# Altium PCB PCB2.PcbDoc
Units mil, origin at the board's own origin, x right, y up, seen from the top; angles counter-clockwise.
Board outline 10.03 x 2033.01 mil, 2 copper layers (Top Layer, Bottom Layer); 35 components, 24 nets, 143 pads, 11 vias.
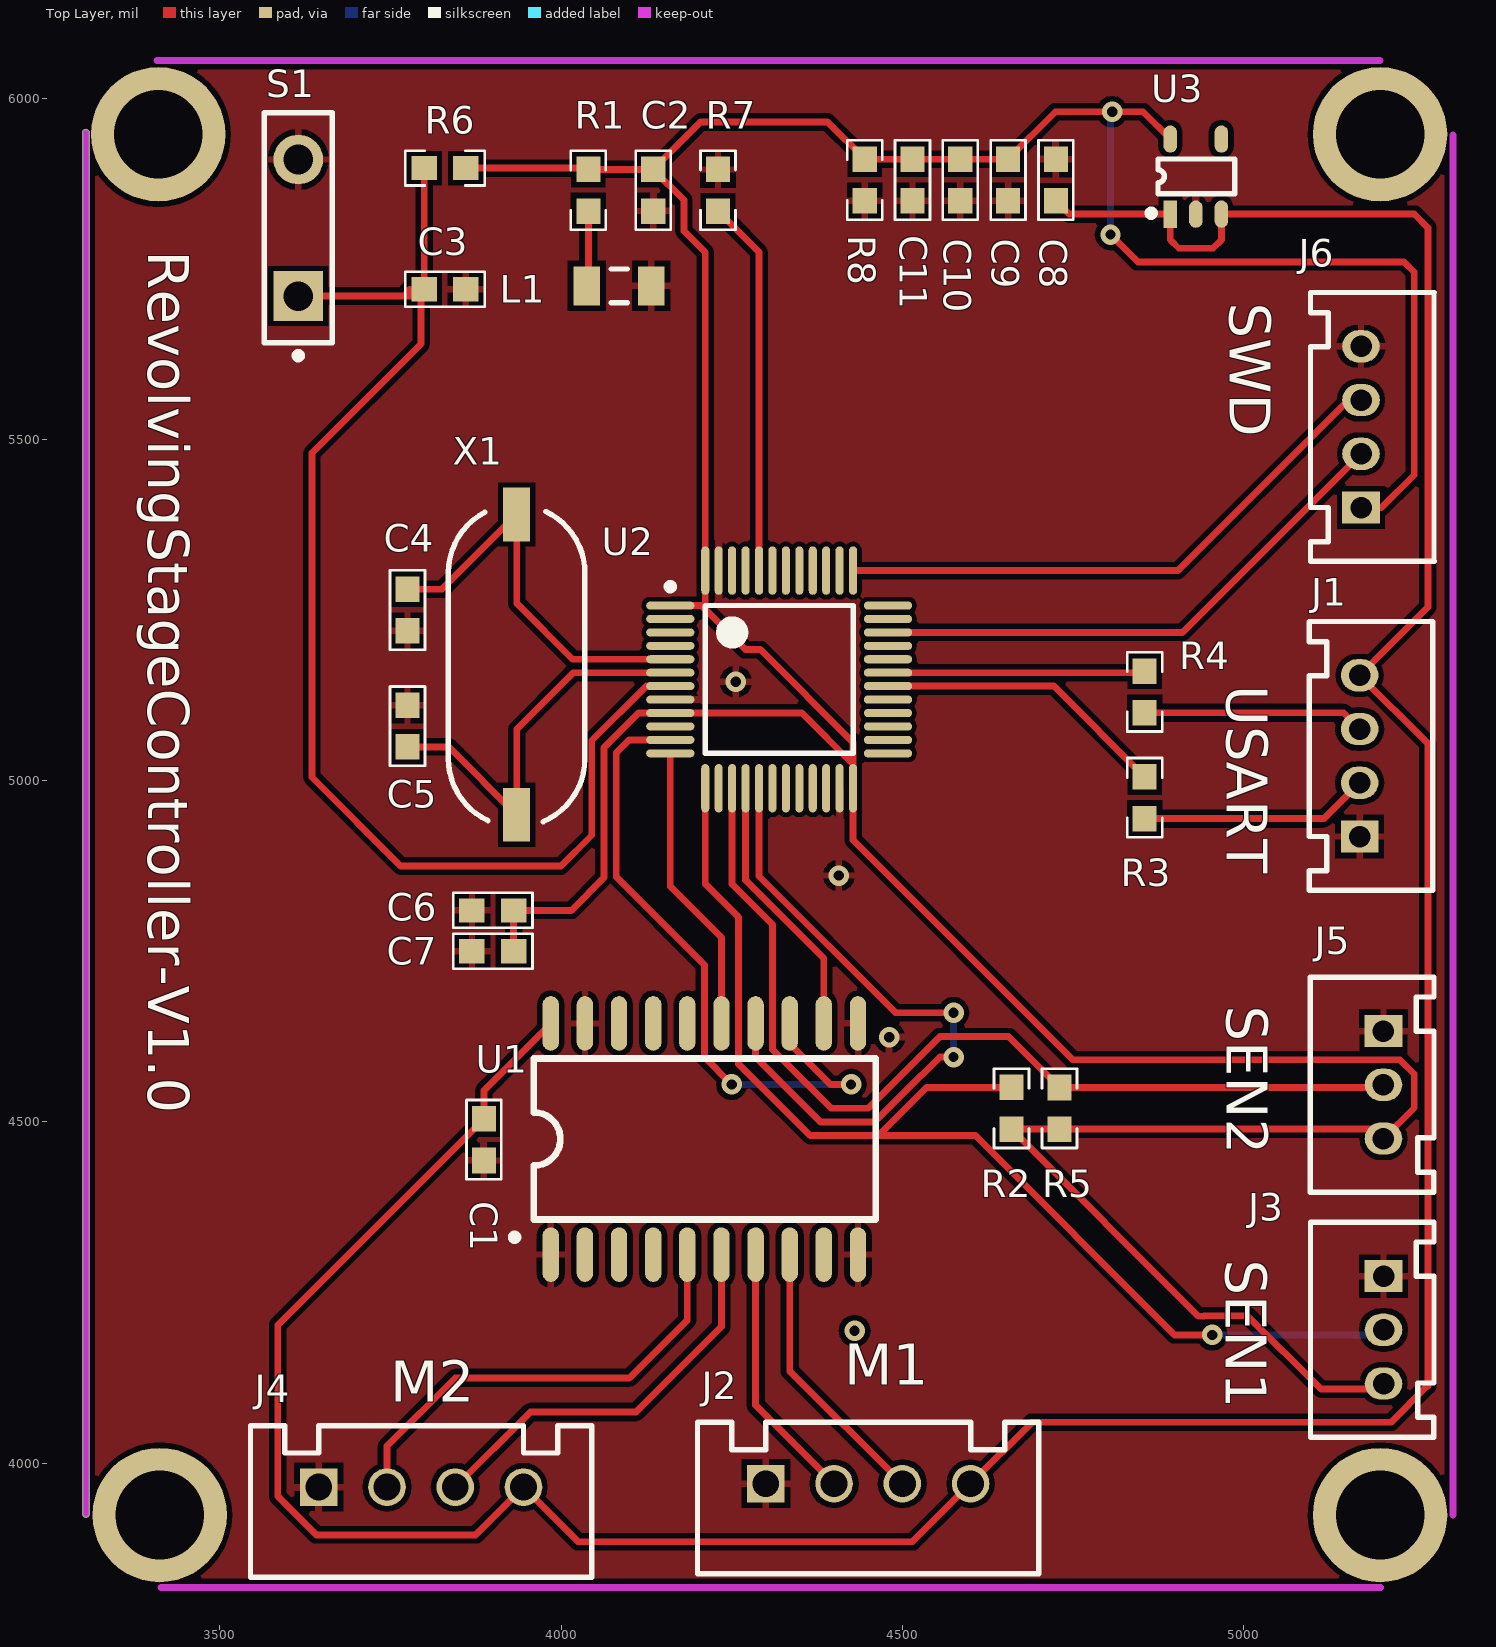
[diagram p0: Top Layer view]
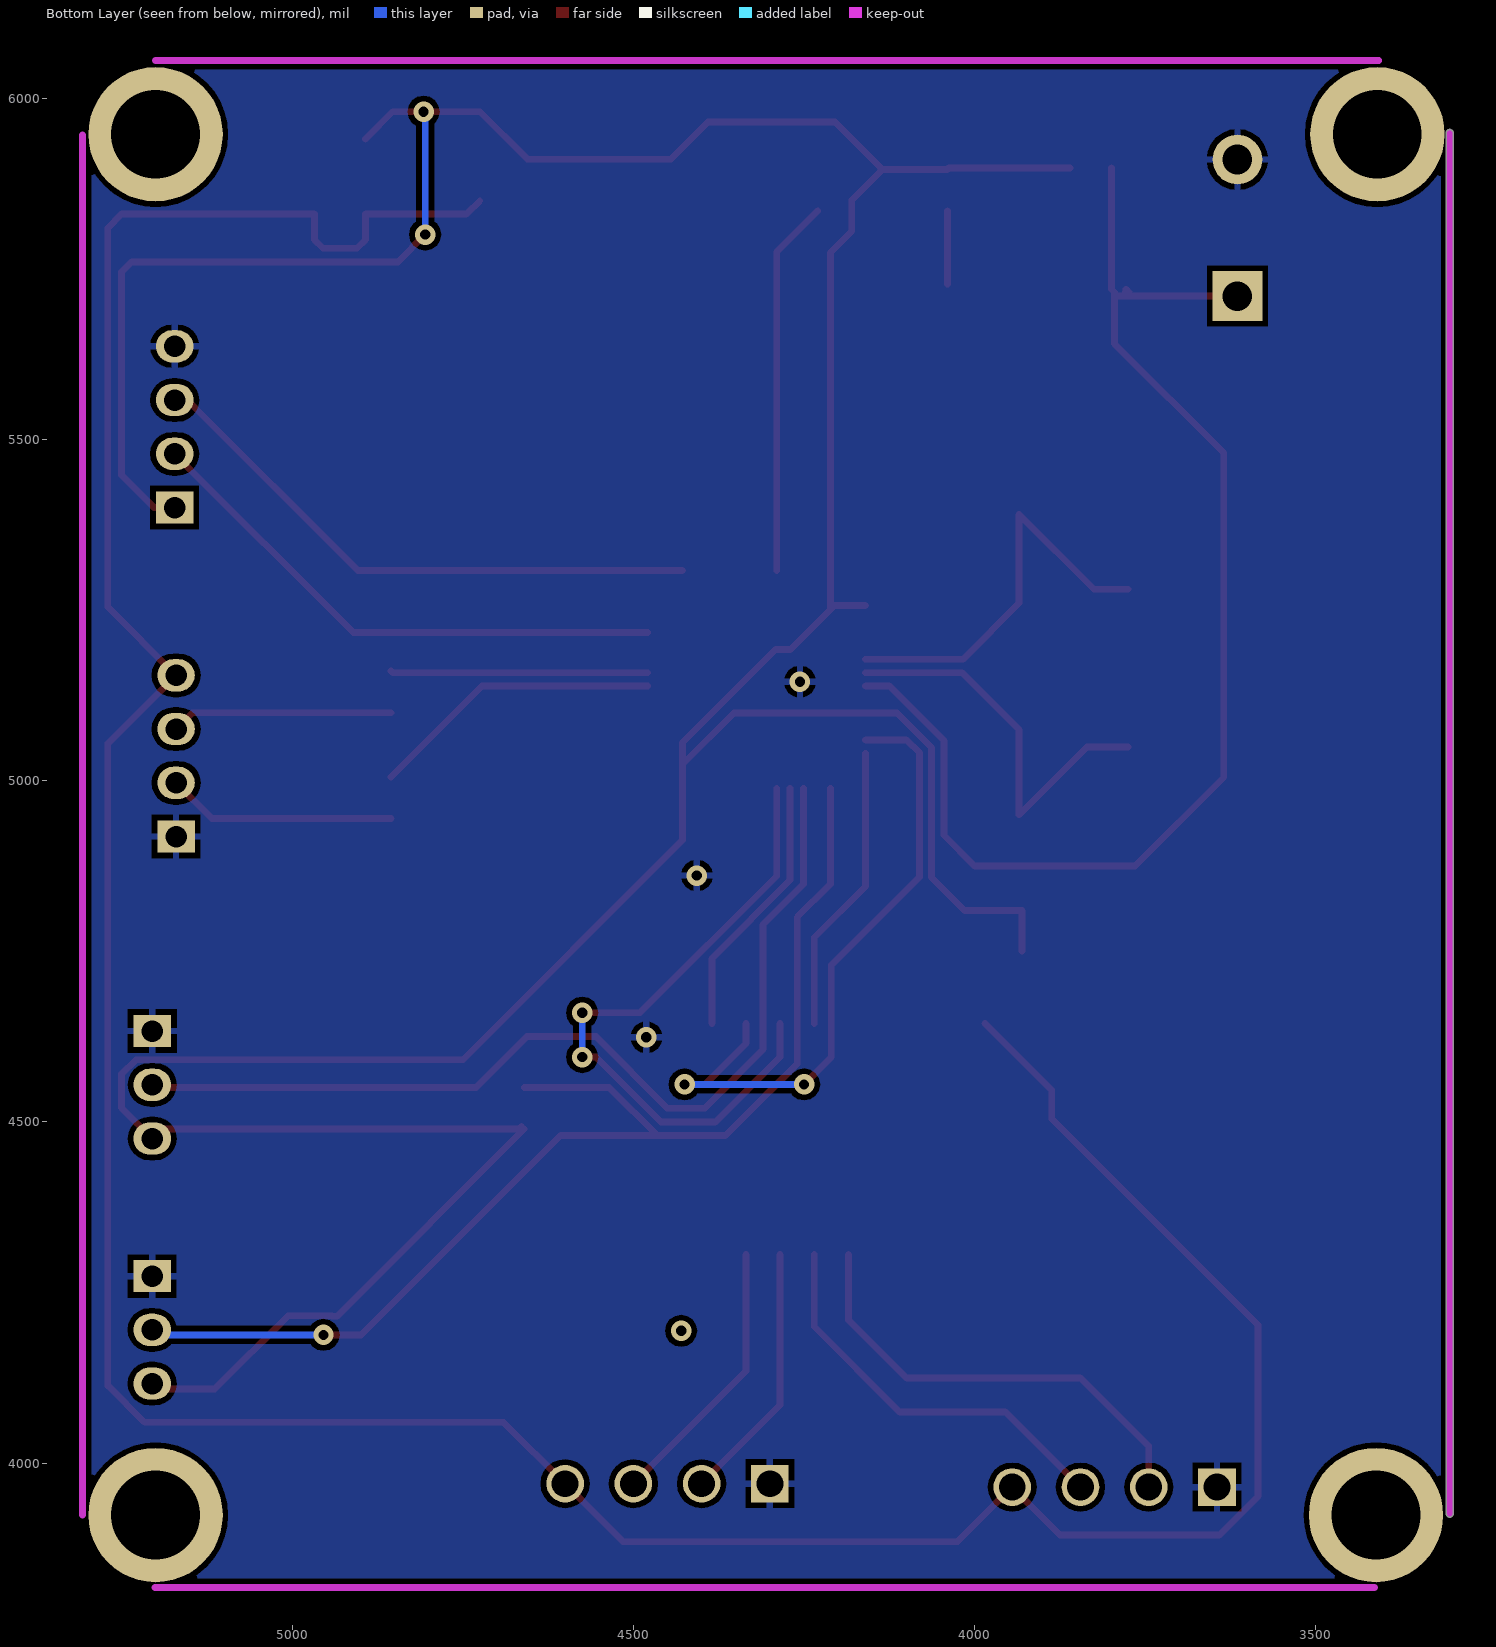
[diagram p1: Bottom Layer view, seen from below]

## Layer stack, top to bottom
Top Layer: signal copper 1.4
Dielectric: dielectric 12.6, FR-4, Dk 4.8
Bottom Layer: signal copper 1.4

## Board outline
3298.99,3926 ccw(c3304,3926) 3309.01,3926 3309.01,5949 ccw(c3304,5949) 3309.01,5949.05 ccw(c3304,5949) 3298.99,5949

## Design rules (kind name [scope] priority, off if disabled: settings)
Clearance mcu [InComponent('U2')] p1: gap=7
Clearance Clearance_1 [All] p2: gap=8
ComponentClearance [All] p1: gap=0 collisioncheckmode=3 verticalgap=0 showdistances=FALSE
HoleSize [All] p1: absolutevalues=TRUE maxlimit=200 minlimit=1 maxpercent=80.000 minpercent=20.000
MinimumSolderMaskSliver [All] p1: minsoldermaskwidth=5
PolygonConnect [All] p1: connectstyle=Relief reliefconductorwidth=10 reliefentries=4 polygonreliefangle="90 Angle"
RoutingVias [All] p1: holewidth=15 width=30 viastyle="Through Hole" minholewidth=2 minwidth=5 maxholewidth=15 maxwidth=30
SilkscreenOverComponentPads [All] p1: minsilkscreentomaskgap=5
SolderMaskExpansion [All] p1: expansion=4
Width [All] p1: maxlimit=20 minlimit=10 preferedwidth=10
24 further rules are at their usual default settings.

## Classes and differential pairs
component class 转台控制板原理图: C1 C2 C3 C4 C5 C6 C7 C8 C9 C10 C11 J1 J2 J3 J4 J5 J6 L1 R1 R2 R3 R4 R5 R6 R7 R8 S1 U1 U2 U3 X1

## Components (designator, comment, footprint, x,y, rotation, side; value= is the part's Value field where it differs from the comment)
C1 "C0603" C0603_M1608 3887,4474 r270 top
C2 "C0603" C0603_M1608 4135,5865 r270 top
C3 "C0603" C0603_M1608 3830,5720 r0 top
C4 "C0603" C0603_M1608 3775,5250 r90 top
C5 "C0603" C0603_M1608 3775,5080 r270 top
C6 "C0603" C0603_M1608 3900,4810 r180 top
C7 "C0603" C0603_M1608 3900,4750 r180 top
C8 "C0603" C0603_M1608 4725,5880 r270 top
C9 "C0603" C0603_M1608 4655,5880 r270 top
C10 "C0603" C0603_M1608 4585,5880 r90 top
C11 "C0603" C0603_M1608 4515,5880 r90 top
J1 "PH2.0-4P" PH2.0-4P 5170,5115 r90 top
J2 "XH2.54-4P" XH2.54-4 4350,3970 r0 top
J3 "PH2.0-3P" PH2.0-3P 5205,4156 r270 top
J4 "XH2.54-4P" XH2.54-4 3695,3965 r0 top
J5 "PH2.0-3P" PH2.0-3P 5204.9,4515 r270 top
J6 "PH2.0-4P" PH2.0-4P 5172,5597 r90 top
L1 "LED" C2012 4085,5725 r0 top
R1 "R0603" 0603 4040,5865 r90 top
R2 "R0603" 0603 4660,4520 r90 top
R3 "R0603" 0603 4855,4975 r90 top
R4 "R0603" 0603 4855,5130 r90 top
R5 "R0603" 0603 4730.31,4519.96 r90 top
R6 "R0603" 0603 3830,5897.48 r180 top
R7 "R0603" 0603 4230,5865 r270 top
R8 "R0603" 0603 4445,5880 r90 top
S1 "SW-PB" SPST-2 3615,5810 r90 top
U1 "SOP-20" SOP-20 4210,4475 r90 top
U2 "LQFP48_N" LQFP48_N 4319.57,5148.31 r0 top
U3 "XC6503D331" SOT23-5 4930,5885 r90 top
X1 "8M" HC-49SMD 3935,5170 r90 top
? "" SH3.3 3412,3925 r0 top
? "" SH3.3 5200,3925 r0 top
? "" SH3.3 5200,5948 r0 top
? "" SH3.3 3410,5948 r0 top

## Footprints (in the part's own frame and the unit in brackets; to place one, negate y for a bottom-side part, rotate by r counter-clockwise, add the part's x,y. Pads: shape width x height; smd on the part's side, far side on the other; paste and mask are expansions set on the pad)
0603 [mm]
  rect 0.95x0.9 smd: 1(-0.775,0) 2(0.775,0)
  silkscreen extent -1.48,-0.65 1.47,0.65
C0603_M1608 [mm] "Chip Cap"
  rect 0.95x0.9 smd: 1(-0.775,0) 2(0.775,0)
  silkscreen extent -1.48,-0.65 1.48,0.65
C2012 [mm] "Chip"
  rect 1x1.45 smd: 1(-1.2,0) 2(1.2,0)
  silkscreen extent -0.3,-0.63 0.3,0.63, body extent -0.98,-0.6 1.02,0.6, height 0.5
HC-49SMD [mm]
  rect 2x1 smd: 1(-5.588,0) 2(5.588,0)
  silkscreen extent -5.84,-2.54 5.7,2.54
LQFP48_N [mm]
  oval 1.8x0.3 smd: 1(-4.05,2.75) 2(-4.05,2.25) 3(-4.05,1.75) 4(-4.05,1.25) 5(-4.05,0.75) 6(-4.05,0.25) 7(-4.05,-0.25) 8(-4.05,-0.75) 9(-4.05,-1.25) 10(-4.05,-1.75) 11(-4.05,-2.25) 12(-4.05,-2.75) 25(4.05,-2.75) 26(4.05,-2.25) 27(4.05,-1.75) 28(4.05,-1.25) 29(4.05,-0.75) 30(4.05,-0.25) 31(4.05,0.25) 32(4.05,0.75) 33(4.05,1.25) 34(4.05,1.75) 35(4.05,2.25) 36(4.05,2.75)
  oval 0.3x1.8 smd: 13(-2.75,-4.05) 14(-2.25,-4.05) 15(-1.75,-4.05) 16(-1.25,-4.05) 17(-0.75,-4.05) 18(-0.25,-4.05) 19(0.25,-4.05) 20(0.75,-4.05) 21(1.25,-4.05) 22(1.75,-4.05) 23(2.25,-4.05) 24(2.75,-4.05) 37(2.75,4.05) 38(2.25,4.05) 39(1.75,4.05) 40(1.25,4.05) 41(0.75,4.05) 42(0.25,4.05) 43(-0.25,4.05) 44(-0.75,4.05) 45(-1.25,4.05) 46(-1.75,4.05) 47(-2.25,4.05) 48(-2.75,4.05)
  silkscreen extent -4.17,-2.75 2.75,3.57
PH2.0-3P [mm]
  rect 1.2x1.4 hole 0.8: 1(-3,0)
  oval 1.2x1.4 hole 0.8: 2(-1,0) 3(1,0)
  silkscreen extent -5,-2.72 3,1.88
PH2.0-4P [mm]
  rect 1.2x1.4 hole 0.8: 1(-5,0)
  oval 1.2x1.4 hole 0.8: 2(-3,0) 3(-1,0) 4(1,0)
  silkscreen extent -7.01,-2.72 3,1.88
SH3.3 [mm]
  round 5 hole 3.3: 1(0,-0.025)
SOP-20 [mil]
  oval 80x24 smd: 1(-169.29,225) 2(-169.29,175) 3(-169.29,125) 4(-169.29,75) 5(-169.29,25) 6(-169.29,-25) 7(-169.29,-75) 8(-169.29,-125) 9(-169.29,-175) 10(-169.29,-225) 11(169.29,-225) 12(169.29,-175) 13(169.29,-125) 14(169.29,-75) 15(169.29,-25) 16(169.29,25) 17(169.29,75) 18(169.29,125) 19(169.29,175) 20(169.29,225)
  silkscreen extent -149,-251 118,283
SOT23-5 [mil] "SOT23, 5-Leads, Body 3.1x3."
  rect 40x20 smd: 1(-55,37.4)
  oval 40x20 smd: 2(-55,0) 3(-55,-37.4) 4(55,-37.4) 5(55,37.4)
  silkscreen extent -59,-57 26,70
SPST-2 [mm]
  rect 1.85x1.85 hole 1.1: 1(-2.54,0)
  round 1.85 hole 1.1: 2(2.54,0)
  silkscreen extent -4.89,-1.27 4.28,1.27
XH2.54-4 [mm]
  rect 1.4x1.4 hole 1: 1(-1.27,0)
  round 1.4 hole 1: 2(1.27,0) 3(3.81,0) 4(6.35,0)
  silkscreen extent -3.81,-3.35 8.89,2.29

## Part data
C1 C2 C3 C4 C5 C6 C7 C8 C9 C10 C11: library part Cap, "Capacitor"
J1 J2 J4 J6: library part "Header 4", "Header"
J3 J5: library part "Header 3", "Header"
R1 R2 R3 R4 R5 R6 R7 R8: library part Res1, "R"
U2: library part STM32F103C8T6, "STM32 ARM-based 32-bit MCU with 64 Kbytes Flash, 48-pin LQFP, Industrial Temp"
U3: library part XC6503Dxxx

## Via types
v1: diameter 30, hole 15, Top Layer to Bottom Layer, 11 vias

## Nets (pads, with @x,y where several pads share a name; then routed paths per layer and width w, separated by ;. In a path a pad name is that pad's centre, name@x,y a point inside that pad or via, vN(x,y) a via of type N, cw(c..) or ccw(c..) an arc to the next point about the centre after c; other vN are vias at no path point)
3.3V: C2.1 C6.1 C7.1 C9.1 C10.2 C11.2 J3.3 J5.3 J6.1 R1.2 R2.1 R5.1 R6.1 R8.2 U2.1 U2.9 U2.24 U2.48 U3.5 | length 6491.1
  Top Layer w10: R6.1 4038.03,5897.48 R1.2 C2.1 ; C7.1 C6.1 4015,4810 4063,4858 4063,5048.46 4113.64,5099.09 U2.9 4352.76,5099.09 U2.24@4427.83,5024.02 ; U2.1 4205.43,5256.57 4211.3,5250.7 ; R2.1 4934.19,4215.3 4941.7,4215.3 4942.4,4216 5006,4216 5113.37,4108.63 J3.3@5203.9,4108.63 ; R2.1@4663.76,4493.24 4667.51,4489.49 4730.27,4489.49 R5.1 5191.08,4489.45 J5.3 5250,4520.73 5250,4570 5229.01,4590.99 4750,4590.99 4427.83,4913.16 U2.24 U2.24@4427.83,5024.02 ; v1(4805,5800) 4845,5760 5235,5760 5250,5745 5250,5448 5202.15,5400.15 J6.1 ; U3.5 4852.6,5980 v1(4807.4,5980) 4724.49,5980 C9.1 C10.2 C11.2 R8.2 4390.51,5965 4204.49,5965 C2.1 ; C2.1 4180,5850.51 4180,5805 4211.3,5773.7 U2.48 4211.3,5250.7 ; 4211.3,5250.7 4270.05,5191.95 4291.95,5191.95 4427.83,5056.06 U2.24@4427.83,5024.02
  Bottom Layer w10: v1(4805,5800) 4805,5977.6 v1(4807.4,5980)
5V: C1.1 C8.2 J1.4 J2.4 J4.4 U1.20 U3.1 U3.3 | length 5149.8
  Top Layer w10: U1.20 3887,4546.29 C1.1 3585,4202.51 3585,3951.5 3641.5,3895 3875,3895 J4.4 4025,3885 4515,3885 J2.4 ; J2.4@4599.49,3970.51 J2.4 ; C8.2 4744.49,5830 U3.1 4892.6,5792.4 4905,5780 4955,5780 4967.4,5792.4 U3.3 5250,5830 5270,5810 5270,5254.37 J1.4 5270,5054.37 5270,4113 ; 5269,4113 5216,4060 4690,4060 J2.4
GND: C1.2 C2.2 C3.2 C4.1 C5.1 C6.2 C7.2 C8.1 C9.2 C10.1 C11.1 J1.1 J2.1 J3.1 J4.1 J5.1 J6.4 L1.2 R7.1 R8.1 S1.2 U1.1 U1.10 U1.11 U1.19 U2.8 U2.23 U2.47 U3.2
  other v1: 4481,4624 4407,4861 4256,5145
NetC4_2: C4.2 U2.5 X1.2 | length 594.5
  Top Layer w10: C4.2 3825.51,5280.51 X1.2 3935,5260 4017.17,5177.83 U2.5
NetC5_2: C5.2 U2.6 X1.1 | length 585.7
  Top Layer w10: C5.2 3835.51,5049.49 X1.1 3935,5074.83 4018.32,5158.15 U2.6
NetJ1_2: J1.2 R3.1 | length 336.7
  Top Layer w10: R3.1 5117.6,4944.49 J1.2
NetJ1_3: J1.3 R4.1 | length 324.9
  Top Layer w10: R4.1 5146.14,5099.49 J1.3
NetJ2_2: J2.2 U1.7 | length 383.3
  Top Layer w10: U1.7 4285,4085 J2.2
NetJ2_3: J2.3 U1.8 | length 404.1
  Top Layer w10: U1.8 4335,4135 J2.3
NetJ4_2: J4.2 U1.5 | length 672.3
  Top Layer w10: J4.2 3745,4025 3845,4125 4100,4125 4185,4210 U1.5
NetJ4_3: J4.3 U1.6 | length 593
  Top Layer w10: J4.3 3955,4075 4110,4075 4235,4200 U1.6
NetL1_1: L1.1 R1.1 | length 107.2
  Top Layer w10: L1.1@4040,5727.24 R1.1
NetR7_2: R7.2 U2.44 | length 551.6
  Top Layer w10: R7.2 4290.04,5774.45 U2.44
RST: C3.1 R6.2 S1.1 U2.7 | length 1912.1
  Top Layer w10: S1.1 3773.96,5710 ; 3773.96,5715.51 3778.45,5720 ; 3779.47,5715.51 3773.96,5710 ; C3.1@3789.49,5710 3773.96,5710 ; C3.1@3795,5715.51 3795,5640 3635,5480 3635,5005 3765,4875 4000,4875 4045,4920 4045,5058.51 4124.95,5138.46 U2.7 ; C3.1 R6.2
SWCLK: J6.3 U2.37 | length 847.7
  Top Layer w10: U2.37 4903.76,5307.76 5153.63,5557.63 J6.3
SWDIO: J6.2 U2.34 | length 801.4
  Top Layer w10: U2.34 4910.31,5217.2 J6.2
UART1RX: R4.2 U2.31 | length 377
  Top Layer w10: U2.31 4852.64,5158.15 R4.2
UART1TX: R3.2 U2.30 | length 431.1
  Top Layer w10: U2.30 4722.05,5138.46 R3.2
信号1: J3.2 R2.2 U2.13 | length 1756.8
  Top Layer w10: U2.13 4211.3,4848.7 4260,4800 4260,4585 4365,4480 4465,4480 ; R2.2 4535.51,4550.51 4465,4480 ; v1(4954,4188) 4899,4188 4607,4480 4465,4480
  Bottom Layer w10: v1(4954,4188) 5203.27,4188 J3.2@5203.9,4187.37
信号2: J5.2 R5.2 U2.15 | length 1414
  Top Layer w10: U2.15 4250.67,4848.42 4310,4789.09 4310,4605.94 4395.94,4520 4450,4520 4555,4625 4655.78,4625 R5.2 5201,4550.47 J5.2
电机1PWM: U1.12 U2.16 | length 392.1
  Top Layer w10: U2.16 4270.35,4854.19 4385,4739.54 U1.12
电机1方向: U1.13 U2.11 | length 967
  Top Layer w10: U2.11 4099.72,5059.72 4081,5041 4081,4859 4210,4730 4210,4595 v1(4250,4555) ; U1.13 4335,4615 4395,4555 v1(4425,4555) v1@4430,4555
  Bottom Layer w10: v1(4250,4555) v1(4425,4555)
电机2PWM: U1.14 U2.17 | length 979.7
  Top Layer w10: U1.14 4285,4595 4380,4500 4459.54,4500 4528.06,4568.51 4528.51,4568.51 4555,4595 v1(4575,4595) ; U2.17 4290.04,4859.96 4490,4660 v1(4575,4660)
  Bottom Layer w10: v1(4575,4595) v1(4575,4660)
电机2方向: U1.15 U2.12 | length 426.8
  Top Layer w10: U2.12 4160.12,4844.88 4235,4770 U1.15
pads on no net: ?.1 U1.2 U1.3 U1.4 U1.9 U1.16 U1.17 U1.18 U2.2 U2.3 U2.4 U2.10 U2.14 U2.18 U2.19 U2.20 U2.21 U2.22 U2.25 U2.26 U2.27 U2.28 U2.29 U2.32 U2.33 U2.35 U2.36 U2.38 U2.39 U2.40 U2.41 U2.42 U2.43 U2.45 U2.46 U3.4
copper on no net:
  other v1: 4430,4194

## Polygon pours and split planes (outlines as drawn)
GND on Top Layer "Bottom Layer-No Net" (solid, remove dead copper, pour order 6): 3189,6128 3184,6123 3184,3780 5400,3780 5410,3770 5379,3801 5379,6142
GND on Bottom Layer "Bottom Layer-No Net" (solid, remove dead copper, pour order 8): 3221,6092 3221,3779 3239,3761 3253,3775 5401,3775 5401,6037 5333,6105

## Keep-outs
Keep-Out Layer:
  lines w10: 3304,3926 3304,5949 ; 3408,6055 5200,6055 ; 3414,3818 5201,3818 ; 5307,3924 5307,5946

## Silkscreen, mask and mechanical layers (free items; w line width, h text height)
Top Overlay:
  text "RevolvingStageController-V1.0" at 3395,5776 h60 r270
  text "SWD" at 4980,5700 h60 r270
  text "USART" at 4975,5140 h60 r270
  text "SEN2" at 4975,4670 h60 r270
  text "SEN1" at 4974,4298 h60 r270
  text "M1" at 4415,4115 h60
  text "M2" at 3750,4090 h60
Bottom Solder:
  lines w10: 3304,3926 ccw(c3413,3927) 3414,3818 ; 3304,5949 cw(c3409.5,5949.5) 3409,6055 ; 5200,6055 cw(c5198.83,5946.83) 5307,5948 ; 5201,3818 ccw(c5201.73,3923.27) 5307,3924
Drill Drawing:
  text ".LEGEND" at 5892,3597 h60
  text "Drill Drawing." at 5897,3467 h60